# Altium PCB PCB1.pcbdoc (part 3 of 4)
Units mil, origin at the board's own origin, x right, y up, seen from the top; angles counter-clockwise.
Board outline 3346.69 x 4227.01 mil, 4 copper layers (Top Layer, Inner1, Inner2, Bottom Layer); 103 components, 144 nets, 660 pads, 262 vias.
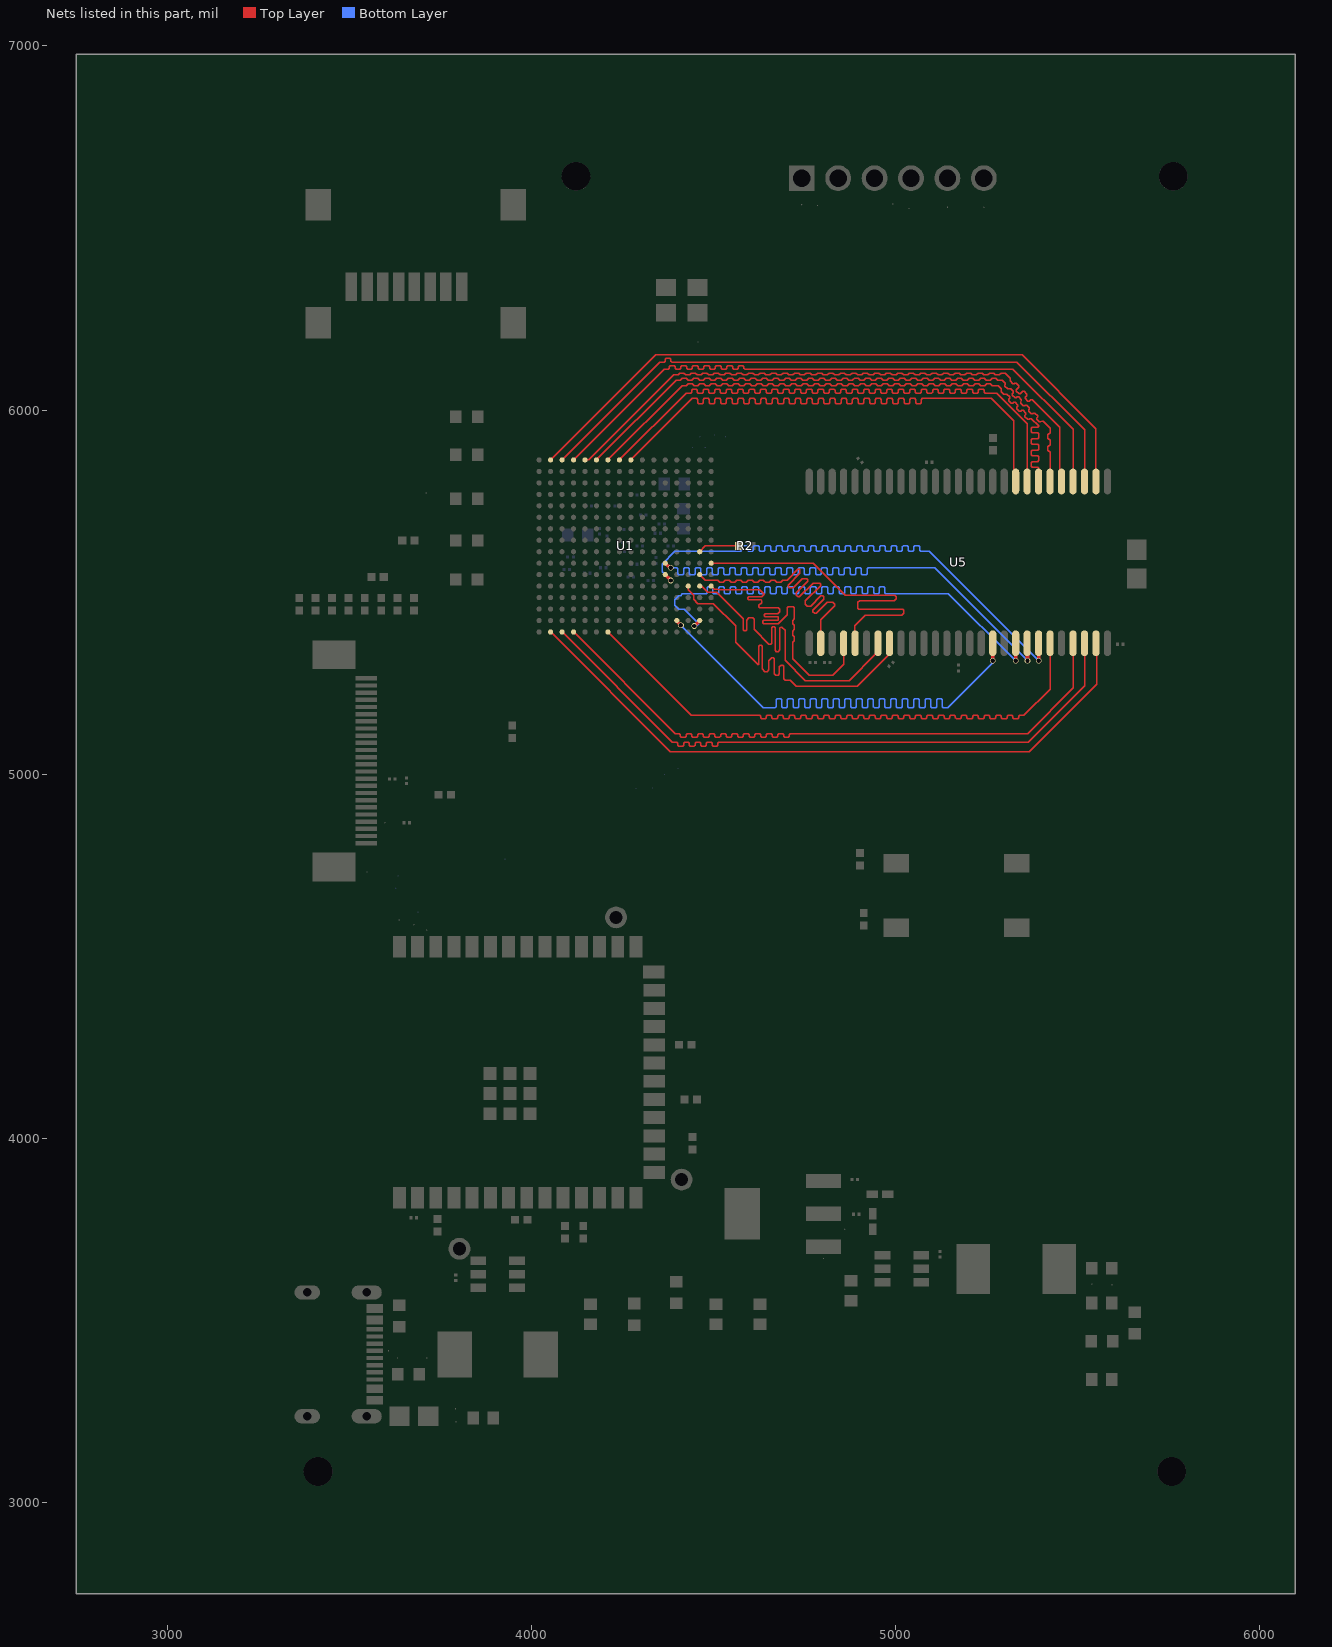
[diagram p5: the nets of this part, all layers, seen from the top]

## Via types
v1: diameter 15.75, hole 11.81, Top Layer to Bottom Layer, 262 vias

## Nets (pads, with @x,y where several pads share a name; then routed paths per layer and width w, separated by ;. In a path a pad name is that pad's centre, name@x,y a point inside that pad or via, vN(x,y) a via of type N, cw(c..) or ccw(c..) an arc to the next point about the centre after c; other vN are vias at no path point) (continued)
SD_A1: U1.T4 U5.24 | length 1796.6
  Top Layer w3.94: U1.T4@4115.28,5390.79 4394.06,5112.01 4405.87,5112.01 4408.65,5109.22 4408.65,5104.79 4411.44,5102.01 4421.62,5102.01 4424.4,5104.79 4424.4,5109.22 4427.18,5112.01 4437.36,5112.01 4440.15,5109.22 4440.15,5104.79 4442.93,5102.01 4453.11,5102.01 4455.9,5104.79 4455.9,5109.22 4458.68,5112.01 4468.86,5112.01 4471.64,5109.22 4471.64,5104.79 4474.43,5102.01 4484.61,5102.01 4487.39,5104.79 4487.39,5109.22 4490.18,5112.01 4500.36,5112.01 4503.14,5109.22 4503.14,5104.79 4505.92,5102.01 4516.11,5102.01 4518.89,5104.79 4518.89,5109.22 4521.67,5112.01 4531.85,5112.01 4534.64,5109.22 4534.64,5104.79 4537.42,5102.01 4547.6,5102.01 4550.39,5104.79 4550.39,5109.22 4553.17,5112.01 4563.35,5112.01 4566.13,5109.22 4566.13,5104.79 4568.92,5102.01 4579.1,5102.01 4581.88,5104.79 4581.88,5109.22 4584.66,5112.01 4594.85,5112.01 4597.63,5109.22 4597.63,5104.79 4600.41,5102.01 4610.59,5102.01 4613.38,5104.79 4613.38,5109.22 4616.16,5112.01 4626.34,5112.01 4629.13,5109.22 4629.13,5104.79 4631.91,5102.01 4642.09,5102.01 4644.87,5104.79 4644.87,5109.22 4647.66,5112.01 4657.84,5112.01 4660.62,5109.22 4660.62,5104.79 4663.41,5102.01 4673.59,5102.01 4676.37,5104.79 4676.37,5109.22 4679.15,5112.01 4689.33,5112.01 4692.12,5109.22 4692.12,5104.79 4694.9,5102.01 4705.08,5102.01 4707.87,5104.79 4707.87,5109.22 4710.65,5112.01 5362.01,5112.01 5487.01,5237.01 U5.24@5487.01,5359.84
SD_A2: U1.T3 U5.25 | length 1806.1
  Top Layer w3.94: U1.T3@4083.78,5390.79 4386.1,5088.47 4398.82,5088.47 4401.6,5085.68 4401.6,5079.79 4404.39,5077.01 4414.57,5077.01 4417.35,5079.79 4417.35,5085.68 4420.13,5088.47 4430.31,5088.47 4433.1,5085.68 4433.1,5079.79 4435.88,5077.01 4446.06,5077.01 4448.85,5079.79 4448.85,5085.68 4451.63,5088.47 4461.81,5088.47 4464.59,5085.68 4464.59,5079.79 4467.38,5077.01 4477.56,5077.01 4480.34,5079.79 4480.34,5085.68 4483.13,5088.47 4493.31,5088.47 4496.09,5085.68 4496.09,5079.79 4498.87,5077.01 4509.06,5077.01 4511.84,5079.79 4511.84,5085.68 4514.62,5088.47 5363.47,5088.47 5518.47,5243.47 U5.25@5518.47,5359.88
SD_A3: U1.T2 U5.26 | length 1826.3
  Top Layer w3.94: U1.T2@4052.29,5390.79 4381.07,5062.01 5367.01,5062.01 5552.01,5247.01 5552.01,5357.83 U5.26@5549.96,5359.88
SD_A4: U1.A2 U5.29 | length 1846.3
  Top Layer w3.94: U1.A2@4052.29,5863.23 4341.07,6152.01 5347.01,6152.01 5549.96,5949.06 U5.29@5549.96,5804.14
SD_A5: U1.A3 U5.30 | length 1778.1
  Top Layer w3.94: U1.A3@4083.78,5863.23 4352.56,6132.01 4364.37,6132.01 4367.15,6134.79 4367.15,6139.22 4369.94,6142.01 4380.12,6142.01 4382.9,6139.22 4382.9,6134.79 4385.68,6132.01 5332.01,6132.01 5518.47,5945.55 U5.30@5518.47,5804.14
SD_A6: U1.A4 U5.31 | length 1780.3
  Top Layer w3.94: U1.A4@4115.28,5863.23 4364.06,6112.01 4375.87,6112.01 4378.65,6114.79 4378.65,6119.22 4381.44,6122.01 4391.62,6122.01 4394.4,6119.22 4394.4,6114.79 4397.18,6112.01 4407.36,6112.01 4410.15,6114.79 4410.15,6119.22 4412.93,6122.01 4423.11,6122.01 4425.9,6119.22 4425.9,6114.79 4428.68,6112.01 4438.86,6112.01 4441.64,6114.79 4441.64,6119.22 4444.43,6122.01 4454.61,6122.01 4457.39,6119.22 4457.39,6114.79 4460.18,6112.01 4470.36,6112.01 4473.14,6114.79 4473.14,6119.22 4475.92,6122.01 4486.11,6122.01 4488.89,6119.22 4488.89,6114.79 4491.67,6112.01 4501.85,6112.01 4504.64,6114.79 4504.64,6119.22 4507.42,6122.01 4517.6,6122.01 4520.39,6119.22 4520.39,6114.79 4523.17,6112.01 4533.35,6112.01 4536.13,6114.79 4536.13,6119.22 4538.92,6122.01 4549.1,6122.01 4551.88,6119.22 4551.88,6114.79 4554.66,6112.01 4564.85,6112.01 4567.63,6114.79 4567.63,6119.22 4570.41,6122.01 4580.59,6122.01 4583.38,6119.22 4583.38,6114.79 4586.16,6112.01 5322.01,6112.01 5486.97,5947.05 U5.31@5486.97,5804.14
SD_A7: U1.A5 U5.32 | length 1774.3
  Top Layer w3.94: U1.A5@4146.77,5863.23 4157,5863.23 4390.78,6097.01 4402.59,6097.01 4407.59,6102.01 4418.34,6102.01 4423.34,6097.01 4434.09,6097.01 4439.09,6102.01 4449.83,6102.01 4454.83,6097.01 4465.58,6097.01 4470.58,6102.01 4481.33,6102.01 4486.33,6097.01 4497.08,6097.01 4502.08,6102.01 4512.83,6102.01 4517.83,6097.01 4528.57,6097.01 4533.57,6102.01 4544.32,6102.01 4549.32,6097.01 4560.07,6097.01 4565.07,6102.01 4575.82,6102.01 4580.82,6097.01 4591.57,6097.01 4596.57,6102.01 4607.31,6102.01 4612.31,6097.01 4623.06,6097.01 4628.06,6102.01 4638.81,6102.01 4643.81,6097.01 4654.56,6097.01 4659.56,6102.01 4670.31,6102.01 4675.31,6097.01 4686.05,6097.01 4691.05,6102.01 4701.8,6102.01 4706.8,6097.01 4717.55,6097.01 4722.55,6102.01 4733.3,6102.01 4738.3,6097.01 4749.05,6097.01 4754.05,6102.01 4764.79,6102.01 4769.79,6097.01 4780.54,6097.01 4785.54,6102.01 4796.29,6102.01 4801.29,6097.01 4812.04,6097.01 4817.04,6102.01 4827.79,6102.01 4832.79,6097.01 4843.53,6097.01 4848.53,6102.01 4859.28,6102.01 4864.28,6097.01 4875.03,6097.01 4880.03,6102.01 4890.78,6102.01 4895.78,6097.01 4906.53,6097.01 4911.53,6102.01 4922.28,6102.01 4927.28,6097.01 4938.02,6097.01 4943.02,6102.01 4953.77,6102.01 4958.77,6097.01 4969.52,6097.01 4974.52,6102.01 4985.27,6102.01 4990.27,6097.01 5001.02,6097.01 5006.02,6102.01 5016.76,6102.01 5021.76,6097.01 5032.51,6097.01 5037.51,6102.01 5048.26,6102.01 5053.26,6097.01 5064.01,6097.01 5069.01,6102.01 5079.76,6102.01 5084.76,6097.01 5095.5,6097.01 5100.5,6102.01 5111.25,6102.01 5116.25,6097.01 5127,6097.01 5132,6102.01 5142.75,6102.01 5147.75,6097.01 5158.5,6097.01 5163.5,6102.01 5174.24,6102.01 5179.24,6097.01 5189.99,6097.01 5194.99,6102.01 5205.74,6102.01 5210.74,6097.01 5221.49,6097.01 5226.49,6102.01 5237.24,6102.01 5242.24,6097.01 5252.98,6097.01 5257.98,6102.01 5268.73,6102.01 5273.73,6097.01 5284.48,6097.01 5289.48,6102.01 5300.23,6102.01 5314.88,6087.35 5314.88,6080.3 5322.08,6073.11 5326.02,6073.11 5326.5,6073.58 5330.43,6073.58 5337.63,6066.39 5337.63,6062.45 5331.56,6056.38 5331.56,6052.44 5338.76,6045.24 5342.69,6045.24 5348.77,6051.31 5352.7,6051.31 5359.9,6044.11 5359.9,6040.18 5355.74,6036.02 5355.74,6032.08 5362.94,6024.88 5366.88,6024.88 5371.04,6029.04 5374.97,6029.04 5450.48,5953.54 5450.48,5809.14 U5.32@5455.48,5804.14
SD_A8: U1.A6 U5.33 | length 1748.8
  Top Layer w3.94: U1.A6@4178.27,5863.23 4397.05,6082.01 4408.86,6082.01 4411.64,6084.79 4411.64,6085.2 4414.43,6087.98 4424.61,6087.98 4427.39,6085.2 4427.39,6084.79 4430.17,6082.01 4440.35,6082.01 4443.14,6084.79 4443.14,6085.2 4445.92,6087.98 4456.1,6087.98 4458.89,6085.2 4458.89,6084.79 4461.67,6082.01 4471.85,6082.01 4474.63,6084.79 4474.63,6085.2 4477.42,6087.98 4487.6,6087.98 4490.38,6085.2 4490.38,6084.79 4493.17,6082.01 4503.35,6082.01 4506.13,6084.79 4506.13,6085.2 4508.91,6087.98 4519.1,6087.98 4521.88,6085.2 4521.88,6084.79 4524.66,6082.01 4534.84,6082.01 4537.63,6084.79 4537.63,6085.2 4540.41,6087.98 4550.59,6087.98 4553.38,6085.2 4553.38,6084.79 4556.16,6082.01 4566.34,6082.01 4569.12,6084.79 4569.12,6085.2 4571.91,6087.98 4582.09,6087.98 4584.87,6085.2 4584.87,6084.79 4587.65,6082.01 4597.84,6082.01 4600.62,6084.79 4600.62,6085.2 4603.4,6087.98 4613.58,6087.98 4616.37,6085.2 4616.37,6084.79 4619.15,6082.01 4629.33,6082.01 4632.12,6084.79 4632.12,6085.2 4634.9,6087.98 4645.08,6087.98 4647.86,6085.2 4647.86,6084.79 4650.65,6082.01 4660.83,6082.01 4663.61,6084.79 4663.61,6085.2 4666.4,6087.98 4676.58,6087.98 4679.36,6085.2 4679.36,6084.79 4682.14,6082.01 4692.32,6082.01 4695.11,6084.79 4695.11,6085.2 4697.89,6087.98 4708.07,6087.98 4710.86,6085.2 4710.86,6084.79 4713.64,6082.01 4723.82,6082.01 4726.6,6084.79 4726.6,6085.2 4729.39,6087.98 4739.57,6087.98 4742.35,6085.2 4742.35,6084.79 4745.14,6082.01 4755.32,6082.01 4758.1,6084.79 4758.1,6085.2 4760.88,6087.98 4771.06,6087.98 4773.85,6085.2 4773.85,6084.79 4776.63,6082.01 4786.81,6082.01 4789.6,6084.79 4789.6,6085.2 4792.38,6087.98 4802.56,6087.98 4805.34,6085.2 4805.34,6084.79 4808.13,6082.01 4818.31,6082.01 4821.09,6084.79 4821.09,6085.2 4823.88,6087.98 4834.06,6087.98 4836.84,6085.2 4836.84,6084.79 4839.62,6082.01 4849.8,6082.01 4852.59,6084.79 4852.59,6085.2 4855.37,6087.98 4865.55,6087.98 4868.34,6085.2 4868.34,6084.79 4871.12,6082.01 4881.3,6082.01 4884.08,6084.79 4884.08,6085.2 4886.87,6087.98 4897.05,6087.98 4899.83,6085.2 4899.83,6084.79 4902.62,6082.01 4912.8,6082.01 4915.58,6084.79 4915.58,6085.2 4918.36,6087.98 4928.54,6087.98 4931.33,6085.2 4931.33,6084.79 4934.11,6082.01 4944.29,6082.01 4947.08,6084.79 4947.08,6085.2 4949.86,6087.98 4960.04,6087.98 4962.82,6085.2 4962.82,6084.79 4965.61,6082.01 4975.79,6082.01 4978.57,6084.79 4978.57,6085.2 4981.36,6087.98 4991.54,6087.98 4994.32,6085.2 4994.32,6084.79 4997.1,6082.01 5007.28,6082.01 5010.07,6084.79 5010.07,6085.2 5012.85,6087.98 5023.03,6087.98 5025.82,6085.2 5025.82,6084.79 5028.6,6082.01 5038.78,6082.01 5041.56,6084.79 5041.56,6085.2 5044.35,6087.98 5054.53,6087.98 5057.31,6085.2 5057.31,6084.79 5060.1,6082.01 5070.28,6082.01 5073.06,6084.79 5073.06,6085.2 5075.84,6087.98 5086.02,6087.98 5088.81,6085.2 5088.81,6084.79 5091.59,6082.01 5101.77,6082.01 5104.56,6084.79 5104.56,6085.2 5107.34,6087.98 5117.52,6087.98 5120.3,6085.2 5120.3,6084.79 5123.09,6082.01 5133.27,6082.01 5136.05,6084.79 5136.05,6085.2 5138.84,6087.98 5149.02,6087.98 5151.8,6085.2 5151.8,6084.79 5154.58,6082.01 5164.76,6082.01 5167.55,6084.79 5167.55,6085.2 5170.33,6087.98 5180.51,6087.98 5183.3,6085.2 5183.3,6084.79 5186.08,6082.01 5196.26,6082.01 5199.04,6084.79 5199.04,6085.2 5201.83,6087.98 5212.01,6087.98 5214.79,6085.2 5214.79,6084.79 5217.58,6082.01 5227.76,6082.01 5230.54,6084.79 5230.54,6085.2 5233.32,6087.98 5243.5,6087.98 5246.29,6085.2 5246.29,6084.79 5249.07,6082.01 5259.25,6082.01 5262.04,6084.79 5262.04,6085.2 5264.82,6087.98 5275,6087.98 5277.78,6085.2 5277.78,6084.79 5280.57,6082.01 5292.01,6082.01 5300.36,6073.66 5300.36,6069.72 5299.88,6069.24 5299.88,6065.3 5307.08,6058.11 5311.02,6058.11 5311.5,6058.58 5315.43,6058.58 5322.63,6051.39 5322.63,6047.45 5320.45,6045.27 5320.45,6041.33 5327.65,6034.13 5331.59,6034.13 5333.77,6036.31 5337.7,6036.31 5344.9,6029.11 5344.9,6025.18 5342.72,6023 5342.72,6019.06 5349.92,6011.86 5353.86,6011.86 5356.04,6014.04 5359.97,6014.04 5367.17,6006.84 5367.17,6002.91 5364.99,6000.73 5364.99,5996.79 5372.19,5989.59 5376.13,5989.59 5378.31,5991.77 5382.25,5991.77 5389.44,5984.57 5389.44,5980.63 5387.61,5978.8 5387.61,5974.86 5394.81,5967.67 5398.75,5967.67 5400.58,5969.5 5404.52,5969.5 5423.98,5950.04 5423.98,5938.23 5421.19,5935.44 5420.52,5935.44 5417.73,5932.66 5417.73,5922.48 5420.52,5919.69 5421.19,5919.69 5423.98,5916.91 5423.98,5905.1 5421.19,5902.32 5420.52,5902.32 5417.73,5899.53 5417.73,5889.35 5420.52,5886.57 5421.19,5886.57 5423.98,5883.78 U5.33@5423.98,5804.14
SD_A9: U1.A7 U5.34 | length 1787.7
  Top Layer w3.94: U1.A7@4209.77,5863.23 4413.55,6067.01 4425.36,6067.01 4428.14,6069.79 4428.14,6070.2 4430.93,6072.98 4441.11,6072.98 4443.89,6070.2 4443.89,6069.79 4446.67,6067.01 4456.85,6067.01 4459.64,6069.79 4459.64,6070.2 4462.42,6072.98 4472.6,6072.98 4475.39,6070.2 4475.39,6069.79 4478.17,6067.01 4488.35,6067.01 4491.13,6069.79 4491.13,6070.2 4493.92,6072.98 4504.1,6072.98 4506.88,6070.2 4506.88,6069.79 4509.67,6067.01 4519.85,6067.01 4522.63,6069.79 4522.63,6070.2 4525.41,6072.98 4535.6,6072.98 4538.38,6070.2 4538.38,6069.79 4541.16,6067.01 4551.34,6067.01 4554.13,6069.79 4554.13,6070.2 4556.91,6072.98 4567.09,6072.98 4569.88,6070.2 4569.88,6069.79 4572.66,6067.01 4582.84,6067.01 4585.62,6069.79 4585.62,6070.2 4588.41,6072.98 4598.59,6072.98 4601.37,6070.2 4601.37,6069.79 4604.15,6067.01 4614.34,6067.01 4617.12,6069.79 4617.12,6070.2 4619.9,6072.98 4630.08,6072.98 4632.87,6070.2 4632.87,6069.79 4635.65,6067.01 4645.83,6067.01 4648.62,6069.79 4648.62,6070.2 4651.4,6072.98 4661.58,6072.98 4664.36,6070.2 4664.36,6069.79 4667.15,6067.01 4677.33,6067.01 4680.11,6069.79 4680.11,6070.2 4682.9,6072.98 4693.08,6072.98 4695.86,6070.2 4695.86,6069.79 4698.64,6067.01 4708.82,6067.01 4711.61,6069.79 4711.61,6070.2 4714.39,6072.98 4724.57,6072.98 4727.36,6070.2 4727.36,6069.79 4730.14,6067.01 4740.32,6067.01 4743.1,6069.79 4743.1,6070.2 4745.89,6072.98 4756.07,6072.98 4758.85,6070.2 4758.85,6069.79 4761.64,6067.01 4771.82,6067.01 4774.6,6069.79 4774.6,6070.2 4777.38,6072.98 4787.56,6072.98 4790.35,6070.2 4790.35,6069.79 4793.13,6067.01 4803.31,6067.01 4806.1,6069.79 4806.1,6070.2 4808.88,6072.98 4819.06,6072.98 4821.84,6070.2 4821.84,6069.79 4824.63,6067.01 4834.81,6067.01 4837.59,6069.79 4837.59,6070.2 4840.38,6072.98 4850.56,6072.98 4853.34,6070.2 4853.34,6069.79 4856.12,6067.01 4866.3,6067.01 4869.09,6069.79 4869.09,6070.2 4871.87,6072.98 4882.05,6072.98 4884.84,6070.2 4884.84,6069.79 4887.62,6067.01 4897.8,6067.01 4900.58,6069.79 4900.58,6070.2 4903.37,6072.98 4913.55,6072.98 4916.33,6070.2 4916.33,6069.79 4919.12,6067.01 4929.3,6067.01 4932.08,6069.79 4932.08,6070.2 4934.86,6072.98 4945.04,6072.98 4947.83,6070.2 4947.83,6069.79 4950.61,6067.01 4960.79,6067.01 4963.58,6069.79 4963.58,6070.2 4966.36,6072.98 4976.54,6072.98 4979.32,6070.2 4979.32,6069.79 4982.11,6067.01 4992.29,6067.01 4995.07,6069.79 4995.07,6070.2 4997.86,6072.98 5008.04,6072.98 5010.82,6070.2 5010.82,6069.79 5013.6,6067.01 5023.78,6067.01 5026.57,6069.79 5026.57,6070.2 5029.35,6072.98 5039.53,6072.98 5042.32,6070.2 5042.32,6069.79 5045.1,6067.01 5055.28,6067.01 5058.06,6069.79 5058.06,6070.2 5060.85,6072.98 5071.03,6072.98 5073.81,6070.2 5073.81,6069.79 5076.6,6067.01 5086.78,6067.01 5089.56,6069.79 5089.56,6070.2 5092.34,6072.98 5102.52,6072.98 5105.31,6070.2 5105.31,6069.79 5108.09,6067.01 5118.27,6067.01 5121.06,6069.79 5121.06,6070.2 5123.84,6072.98 5134.02,6072.98 5136.8,6070.2 5136.8,6069.79 5139.59,6067.01 5149.77,6067.01 5152.55,6069.79 5152.55,6070.2 5155.34,6072.98 5165.52,6072.98 5168.3,6070.2 5168.3,6069.79 5171.08,6067.01 5181.26,6067.01 5184.05,6069.79 5184.05,6070.2 5186.83,6072.98 5197.01,6072.98 5199.8,6070.2 5199.8,6069.79 5202.58,6067.01 5212.76,6067.01 5215.54,6069.79 5215.54,6070.2 5218.33,6072.98 5228.51,6072.98 5231.29,6070.2 5231.29,6069.79 5234.08,6067.01 5244.26,6067.01 5247.04,6069.79 5247.04,6070.2 5249.82,6072.98 5260,6072.98 5262.79,6070.2 5262.79,6069.79 5265.57,6067.01 5282.01,6067.01 5290.36,6058.66 5290.36,6054.72 5289.88,6054.24 5289.88,6050.3 5297.08,6043.11 5301.02,6043.11 5301.5,6043.58 5305.43,6043.58 5312.63,6036.39 5312.63,6032.45 5310.45,6030.27 5310.45,6026.33 5317.65,6019.13 5321.59,6019.13 5323.77,6021.31 5327.7,6021.31 5334.9,6014.11 5334.9,6010.18 5332.72,6008 5332.72,6004.06 5339.92,5996.86 5343.86,5996.86 5346.04,5999.04 5349.97,5999.04 5357.17,5991.84 5357.17,5987.91 5354.99,5985.73 5354.99,5981.79 5362.19,5974.59 5366.13,5974.59 5368.31,5976.77 5372.25,5976.77 5392.48,5956.54 5392.48,5956.22 5389.69,5953.44 5374.79,5953.44 5372.01,5950.65 5372.01,5940.47 5374.79,5937.69 5389.69,5937.69 5392.48,5934.9 5392.48,5924.72 5389.69,5921.94 5374.79,5921.94 5372.01,5919.16 5372.01,5908.98 5374.79,5906.19 5389.69,5906.19 5392.48,5903.41 5392.48,5893.23 5389.69,5890.44 5374.79,5890.44 5372.01,5887.66 5372.01,5877.48 5374.79,5874.7 5389.69,5874.7 5392.48,5871.91 5392.48,5861.73 5389.69,5858.95 5374.79,5858.95 5372.01,5856.16 5372.01,5845.98 5374.79,5843.2 5389.69,5843.2 5392.48,5840.42 U5.34@5392.48,5804.14
SD_A10: U1.T7 U5.22 | length 1774.7
  Top Layer w3.94: U1.T7@4209.77,5390.79 4438.55,5162.01 4625.97,5162.01 4628.75,5159.22 4628.75,5154.79 4631.54,5152.01 4641.72,5152.01 4644.5,5154.79 4644.5,5159.22 4647.28,5162.01 4657.46,5162.01 4660.25,5159.22 4660.25,5154.79 4663.03,5152.01 4673.21,5152.01 4676,5154.79 4676,5159.22 4678.78,5162.01 4688.96,5162.01 4691.74,5159.22 4691.74,5154.79 4694.53,5152.01 4704.71,5152.01 4707.49,5154.79 4707.49,5159.22 4710.28,5162.01 4720.46,5162.01 4723.24,5159.22 4723.24,5154.79 4726.02,5152.01 4736.2,5152.01 4738.99,5154.79 4738.99,5159.22 4741.77,5162.01 4751.95,5162.01 4754.74,5159.22 4754.74,5154.79 4757.52,5152.01 4767.7,5152.01 4770.48,5154.79 4770.48,5159.22 4773.27,5162.01 4783.45,5162.01 4786.23,5159.22 4786.23,5154.79 4789.02,5152.01 4799.2,5152.01 4801.98,5154.79 4801.98,5159.22 4804.76,5162.01 4814.94,5162.01 4817.73,5159.22 4817.73,5154.79 4820.51,5152.01 4830.69,5152.01 4833.48,5154.79 4833.48,5159.22 4836.26,5162.01 4846.44,5162.01 4849.22,5159.22 4849.22,5154.79 4852.01,5152.01 4862.19,5152.01 4864.97,5154.79 4864.97,5159.22 4867.76,5162.01 4877.94,5162.01 4880.72,5159.22 4880.72,5154.79 4883.5,5152.01 4893.68,5152.01 4896.47,5154.79 4896.47,5159.22 4899.25,5162.01 4909.43,5162.01 4912.22,5159.22 4912.22,5154.79 4915,5152.01 4925.18,5152.01 4927.96,5154.79 4927.96,5159.22 4930.75,5162.01 4940.93,5162.01 4943.71,5159.22 4943.71,5154.79 4946.5,5152.01 4956.68,5152.01 4959.46,5154.79 4959.46,5159.22 4962.24,5162.01 4972.42,5162.01 4975.21,5159.22 4975.21,5154.79 4977.99,5152.01 4988.17,5152.01 4990.96,5154.79 4990.96,5159.22 4993.74,5162.01 5003.92,5162.01 5006.7,5159.22 5006.7,5154.79 5009.49,5152.01 5019.67,5152.01 5022.45,5154.79 5022.45,5159.22 5025.24,5162.01 5035.42,5162.01 5038.2,5159.22 5038.2,5154.79 5040.98,5152.01 5051.16,5152.01 5053.95,5154.79 5053.95,5159.22 5056.73,5162.01 5066.91,5162.01 5069.7,5159.22 5069.7,5154.79 5072.48,5152.01 5082.66,5152.01 5085.44,5154.79 5085.44,5159.22 5088.23,5162.01 5098.41,5162.01 5101.19,5159.22 5101.19,5154.79 5103.98,5152.01 5114.16,5152.01 5116.94,5154.79 5116.94,5159.22 5119.72,5162.01 5129.9,5162.01 5132.69,5159.22 5132.69,5154.79 5135.47,5152.01 5145.65,5152.01 5148.44,5154.79 5148.44,5159.22 5151.22,5162.01 5161.4,5162.01 5164.18,5159.22 5164.18,5154.79 5166.97,5152.01 5177.15,5152.01 5179.93,5154.79 5179.93,5159.22 5182.72,5162.01 5192.9,5162.01 5195.68,5159.22 5195.68,5154.79 5198.46,5152.01 5208.64,5152.01 5211.43,5154.79 5211.43,5159.22 5214.21,5162.01 5224.39,5162.01 5227.18,5159.22 5227.18,5154.79 5229.96,5152.01 5240.14,5152.01 5242.92,5154.79 5242.92,5159.22 5245.71,5162.01 5255.89,5162.01 5258.67,5159.22 5258.67,5154.79 5261.46,5152.01 5271.64,5152.01 5274.42,5154.79 5274.42,5159.22 5277.2,5162.01 5287.39,5162.01 5290.17,5159.22 5290.17,5154.79 5292.95,5152.01 5303.13,5152.01 5305.92,5154.79 5305.92,5159.22 5308.7,5162.01 5318.88,5162.01 5321.66,5159.22 5321.66,5154.79 5324.45,5152.01 5334.63,5152.01 5337.41,5154.79 5337.41,5159.22 5340.2,5162.01 5352.01,5162.01 5423.98,5233.98 U5.22@5423.98,5359.88
SD_A11: U1.A8 U5.35 | length 1739.9
  Top Layer w3.94: U1.A8@4241.26,5863.23 4425.04,6047.01 4436.85,6047.01 4439.63,6049.79 4439.63,6054.22 4442.42,6057.01 4452.6,6057.01 4455.38,6054.22 4455.38,6049.79 4458.16,6047.01 4468.35,6047.01 4471.13,6049.79 4471.13,6054.22 4473.91,6057.01 4484.09,6057.01 4486.88,6054.22 4486.88,6049.79 4489.66,6047.01 4499.84,6047.01 4502.62,6049.79 4502.62,6054.22 4505.41,6057.01 4515.59,6057.01 4518.37,6054.22 4518.37,6049.79 4521.16,6047.01 4531.34,6047.01 4534.12,6049.79 4534.12,6054.22 4536.9,6057.01 4547.09,6057.01 4549.87,6054.22 4549.87,6049.79 4552.65,6047.01 4562.83,6047.01 4565.62,6049.79 4565.62,6054.22 4568.4,6057.01 4578.58,6057.01 4581.37,6054.22 4581.37,6049.79 4584.15,6047.01 4594.33,6047.01 4597.11,6049.79 4597.11,6054.22 4599.9,6057.01 4610.08,6057.01 4612.86,6054.22 4612.86,6049.79 4615.65,6047.01 4625.83,6047.01 4628.61,6049.79 4628.61,6054.22 4631.39,6057.01 4641.57,6057.01 4644.36,6054.22 4644.36,6049.79 4647.14,6047.01 4657.32,6047.01 4660.11,6049.79 4660.11,6054.22 4662.89,6057.01 4673.07,6057.01 4675.85,6054.22 4675.85,6049.79 4678.64,6047.01 4688.82,6047.01 4691.6,6049.79 4691.6,6054.22 4694.39,6057.01 4704.57,6057.01 4707.35,6054.22 4707.35,6049.79 4710.13,6047.01 4720.31,6047.01 4723.1,6049.79 4723.1,6054.22 4725.88,6057.01 4736.06,6057.01 4738.85,6054.22 4738.85,6049.79 4741.63,6047.01 4751.81,6047.01 4754.59,6049.79 4754.59,6054.22 4757.38,6057.01 4767.56,6057.01 4770.34,6054.22 4770.34,6049.79 4773.13,6047.01 4783.31,6047.01 4786.09,6049.79 4786.09,6054.22 4788.87,6057.01 4799.05,6057.01 4801.84,6054.22 4801.84,6049.79 4804.62,6047.01 4814.8,6047.01 4817.59,6049.79 4817.59,6054.22 4820.37,6057.01 4830.55,6057.01 4833.33,6054.22 4833.33,6049.79 4836.12,6047.01 4846.3,6047.01 4849.08,6049.79 4849.08,6054.22 4851.87,6057.01 4862.05,6057.01 4864.83,6054.22 4864.83,6049.79 4867.61,6047.01 4877.79,6047.01 4880.58,6049.79 4880.58,6054.22 4883.36,6057.01 4893.54,6057.01 4896.33,6054.22 4896.33,6049.79 4899.11,6047.01 4909.29,6047.01 4912.07,6049.79 4912.07,6054.22 4914.86,6057.01 4925.04,6057.01 4927.82,6054.22 4927.82,6049.79 4930.61,6047.01 4940.79,6047.01 4943.57,6049.79 4943.57,6054.22 4946.35,6057.01 4956.53,6057.01 4959.32,6054.22 4959.32,6049.79 4962.1,6047.01 4972.28,6047.01 4975.07,6049.79 4975.07,6054.22 4977.85,6057.01 4988.03,6057.01 4990.81,6054.22 4990.81,6049.79 4993.6,6047.01 5003.78,6047.01 5006.56,6049.79 5006.56,6054.22 5009.35,6057.01 5019.53,6057.01 5022.31,6054.22 5022.31,6049.79 5025.09,6047.01 5035.27,6047.01 5038.06,6049.79 5038.06,6054.22 5040.84,6057.01 5051.02,6057.01 5053.81,6054.22 5053.81,6049.79 5056.59,6047.01 5066.77,6047.01 5069.55,6049.79 5069.55,6054.22 5072.34,6057.01 5082.52,6057.01 5085.3,6054.22 5085.3,6049.79 5088.09,6047.01 5098.27,6047.01 5101.05,6049.79 5101.05,6054.22 5103.83,6057.01 5114.01,6057.01 5116.8,6054.22 5116.8,6049.79 5119.58,6047.01 5129.76,6047.01 5132.55,6049.79 5132.55,6054.22 5135.33,6057.01 5145.51,6057.01 5148.29,6054.22 5148.29,6049.79 5151.08,6047.01 5161.26,6047.01 5164.04,6049.79 5164.04,6054.22 5166.83,6057.01 5177.01,6057.01 5179.79,6054.22 5179.79,6049.79 5182.57,6047.01 5192.75,6047.01 5195.54,6049.79 5195.54,6054.22 5198.32,6057.01 5208.5,6057.01 5211.29,6054.22 5211.29,6049.79 5214.07,6047.01 5224.25,6047.01 5227.03,6049.79 5227.03,6054.22 5229.82,6057.01 5240,6057.01 5242.78,6054.22 5242.78,6049.79 5245.57,6047.01 5277.01,6047.01 5360.99,5963.03 U5.35@5360.99,5804.14
SD_A12: U1.A9 U5.36 | length 1784.5
  Top Layer w3.94: U1.A9@4272.76,5863.23 4441.54,6032.01 4453.35,6032.01 4456.13,6029.22 4456.13,6019.79 4458.92,6017.01 4469.1,6017.01 4471.88,6019.79 4471.88,6029.22 4474.66,6032.01 4484.85,6032.01 4487.63,6029.22 4487.63,6019.79 4490.41,6017.01 4500.59,6017.01 4503.38,6019.79 4503.38,6029.22 4506.16,6032.01 4516.34,6032.01 4519.12,6029.22 4519.12,6019.79 4521.91,6017.01 4532.09,6017.01 4534.87,6019.79 4534.87,6029.22 4537.66,6032.01 4547.84,6032.01 4550.62,6029.22 4550.62,6019.79 4553.4,6017.01 4563.59,6017.01 4566.37,6019.79 4566.37,6029.22 4569.15,6032.01 4579.33,6032.01 4582.12,6029.22 4582.12,6019.79 4584.9,6017.01 4595.08,6017.01 4597.87,6019.79 4597.87,6029.22 4600.65,6032.01 4610.83,6032.01 4613.61,6029.22 4613.61,6019.79 4616.4,6017.01 4626.58,6017.01 4629.36,6019.79 4629.36,6029.22 4632.15,6032.01 4642.33,6032.01 4645.11,6029.22 4645.11,6019.79 4647.89,6017.01 4658.07,6017.01 4660.86,6019.79 4660.86,6029.22 4663.64,6032.01 4673.82,6032.01 4676.61,6029.22 4676.61,6019.79 4679.39,6017.01 4689.57,6017.01 4692.35,6019.79 4692.35,6029.22 4695.14,6032.01 4705.32,6032.01 4708.1,6029.22 4708.1,6019.79 4710.89,6017.01 4721.07,6017.01 4723.85,6019.79 4723.85,6029.22 4726.63,6032.01 4736.81,6032.01 4739.6,6029.22 4739.6,6019.79 4742.38,6017.01 4752.56,6017.01 4755.35,6019.79 4755.35,6029.22 4758.13,6032.01 4768.31,6032.01 4771.09,6029.22 4771.09,6019.79 4773.88,6017.01 4784.06,6017.01 4786.84,6019.79 4786.84,6029.22 4789.63,6032.01 4799.81,6032.01 4802.59,6029.22 4802.59,6019.79 4805.37,6017.01 4815.55,6017.01 4818.34,6019.79 4818.34,6029.22 4821.12,6032.01 4831.3,6032.01 4834.09,6029.22 4834.09,6019.79 4836.87,6017.01 4847.05,6017.01 4849.83,6019.79 4849.83,6029.22 4852.62,6032.01 4862.8,6032.01 4865.58,6029.22 4865.58,6019.79 4868.37,6017.01 4878.55,6017.01 4881.33,6019.79 4881.33,6029.22 4884.11,6032.01 4894.29,6032.01 4897.08,6029.22 4897.08,6019.79 4899.86,6017.01 4910.04,6017.01 4912.83,6019.79 4912.83,6029.22 4915.61,6032.01 4925.79,6032.01 4928.57,6029.22 4928.57,6019.79 4931.36,6017.01 4941.54,6017.01 4944.32,6019.79 4944.32,6029.22 4947.11,6032.01 4957.29,6032.01 4960.07,6029.22 4960.07,6019.79 4962.85,6017.01 4973.03,6017.01 4975.82,6019.79 4975.82,6029.22 4978.6,6032.01 4988.78,6032.01 4991.57,6029.22 4991.57,6019.79 4994.35,6017.01 5004.53,6017.01 5007.31,6019.79 5007.31,6029.22 5010.1,6032.01 5020.28,6032.01 5023.06,6029.22 5023.06,6019.79 5025.85,6017.01 5036.03,6017.01 5038.81,6019.79 5038.81,6029.22 5041.59,6032.01 5051.77,6032.01 5054.56,6029.22 5054.56,6019.79 5057.34,6017.01 5067.52,6017.01 5070.31,6019.79 5070.31,6029.22 5073.09,6032.01 5262.01,6032.01 5323.81,5970.2 5323.81,5819.81 5324.49,5819.14 5324.49,5809.14 U5.36@5329.49,5804.14
SD_BA0: U1.K12 U5.20 | length 1708.5
  Top Layer w10: U1.K12@4367.25,5579.77 4380.07,5566.94 v1(4381.94,5566.94) ; U5.20@5360.99,5359.88 5362.01,5358.86 v1(5362.01,5312.01)
  Bottom Layer w3.94: v1(4381.94,5566.94) 4399.31,5566.94 4402.09,5564.16 4402.09,5550.16 4404.87,5547.37 4415.05,5547.37 4417.84,5550.16 4417.84,5564.16 4420.62,5566.94 4430.8,5566.94 4433.59,5564.16 4433.59,5550.16 4436.37,5547.37 4446.55,5547.37 4449.33,5550.16 4449.33,5564.16 4452.12,5566.94 4462.3,5566.94 4465.08,5564.16 4465.08,5550.16 4467.87,5547.37 4478.05,5547.37 4480.83,5550.16 4480.83,5564.16 4483.61,5566.94 4493.79,5566.94 4496.58,5564.16 4496.58,5550.16 4499.36,5547.37 4509.54,5547.37 4512.33,5550.16 4512.33,5564.16 4515.11,5566.94 4525.29,5566.94 4528.07,5564.16 4528.07,5550.16 4530.86,5547.37 4541.04,5547.37 4543.82,5550.16 4543.82,5564.16 4546.61,5566.94 4556.79,5566.94 4559.57,5564.16 4559.57,5550.16 4562.35,5547.37 4572.53,5547.37 4575.32,5550.16 4575.32,5564.16 4578.1,5566.94 4588.28,5566.94 4591.07,5564.16 4591.07,5550.16 4593.85,5547.37 4604.03,5547.37 4606.81,5550.16 4606.81,5564.16 4609.6,5566.94 4619.78,5566.94 4622.56,5564.16 4622.56,5550.16 4625.35,5547.37 4635.53,5547.37 4638.31,5550.16 4638.31,5564.16 4641.09,5566.94 4651.27,5566.94 4654.06,5564.16 4654.06,5550.16 4656.84,5547.37 4667.02,5547.37 4669.81,5550.16 4669.81,5564.16 4672.59,5566.94 4682.77,5566.94 4685.55,5564.16 4685.55,5550.16 4688.34,5547.37 4698.52,5547.37 4701.3,5550.16 4701.3,5564.16 4704.09,5566.94 4714.27,5566.94 4717.05,5564.16 4717.05,5550.16 4719.83,5547.37 4730.01,5547.37 4732.8,5550.16 4732.8,5564.16 4735.58,5566.94 4745.76,5566.94 4748.55,5564.16 4748.55,5550.16 4751.33,5547.37 4761.51,5547.37 4764.29,5550.16 4764.29,5564.16 4767.08,5566.94 4777.26,5566.94 4780.04,5564.16 4780.04,5550.16 4782.83,5547.37 4793.01,5547.37 4795.79,5550.16 4795.79,5564.16 4798.57,5566.94 4808.75,5566.94 4811.54,5564.16 4811.54,5550.16 4814.32,5547.37 4824.5,5547.37 4827.29,5550.16 4827.29,5564.16 4830.07,5566.94 4840.25,5566.94 4843.03,5564.16 4843.03,5550.16 4845.82,5547.37 4856,5547.37 4858.78,5550.16 4858.78,5564.16 4861.57,5566.94 4871.75,5566.94 4874.53,5564.16 4874.53,5550.16 4877.31,5547.37 4887.49,5547.37 4890.28,5550.16 4890.28,5564.16 4893.06,5566.94 4903.24,5566.94 4906.03,5564.16 4906.03,5550.16 4908.81,5547.37 4918.99,5547.37 4921.77,5550.16 4921.77,5564.16 4924.56,5566.94 5107.07,5566.94 v1(5362.01,5312.01)
SD_BA1: U1.L12 U5.21 | length 1673.6
  Top Layer w10: U1.L12@4367.25,5548.27 4382.01,5533.51 v1(4382.01,5532.01) ; v1(5392.48,5312.01) U5.21@5392.48,5359.88
  Bottom Layer w3.94: v1(4382.01,5532.01) 4358.24,5555.77 4358.24,5576.76 4393.49,5612.01 4574.9,5612.01 4577.68,5614.79 4577.68,5624.22 4580.46,5627.01 4590.64,5627.01 4593.43,5624.22 4593.43,5614.79 4596.21,5612.01 4606.39,5612.01 4609.18,5614.79 4609.18,5624.22 4611.96,5627.01 4622.14,5627.01 4624.92,5624.22 4624.92,5614.79 4627.71,5612.01 4637.89,5612.01 4640.67,5614.79 4640.67,5624.22 4643.46,5627.01 4653.64,5627.01 4656.42,5624.22 4656.42,5614.79 4659.2,5612.01 4669.38,5612.01 4672.17,5614.79 4672.17,5624.22 4674.95,5627.01 4685.13,5627.01 4687.92,5624.22 4687.92,5614.79 4690.7,5612.01 4700.88,5612.01 4703.66,5614.79 4703.66,5624.22 4706.45,5627.01 4716.63,5627.01 4719.41,5624.22 4719.41,5614.79 4722.2,5612.01 4732.38,5612.01 4735.16,5614.79 4735.16,5624.22 4737.94,5627.01 4748.12,5627.01 4750.91,5624.22 4750.91,5614.79 4753.69,5612.01 4763.87,5612.01 4766.66,5614.79 4766.66,5624.22 4769.44,5627.01 4779.62,5627.01 4782.4,5624.22 4782.4,5614.79 4785.19,5612.01 4795.37,5612.01 4798.15,5614.79 4798.15,5624.22 4800.94,5627.01 4811.12,5627.01 4813.9,5624.22 4813.9,5614.79 4816.68,5612.01 4826.86,5612.01 4829.65,5614.79 4829.65,5624.22 4832.43,5627.01 4842.61,5627.01 4845.4,5624.22 4845.4,5614.79 4848.18,5612.01 4858.36,5612.01 4861.14,5614.79 4861.14,5624.22 4863.93,5627.01 4874.11,5627.01 4876.89,5624.22 4876.89,5614.79 4879.68,5612.01 4889.86,5612.01 4892.64,5614.79 4892.64,5624.22 4895.42,5627.01 4905.6,5627.01 4908.39,5624.22 4908.39,5614.79 4911.17,5612.01 4921.35,5612.01 4924.14,5614.79 4924.14,5624.22 4926.92,5627.01 4937.1,5627.01 4939.88,5624.22 4939.88,5614.79 4942.67,5612.01 4952.85,5612.01 4955.63,5614.79 4955.63,5624.22 4958.42,5627.01 4968.6,5627.01 4971.38,5624.22 4971.38,5614.79 4974.16,5612.01 4984.34,5612.01 4987.13,5614.79 4987.13,5624.22 4989.91,5627.01 5000.09,5627.01 5002.88,5624.22 5002.88,5614.79 5005.66,5612.01 5015.84,5612.01 5018.62,5614.79 5018.62,5624.22 5021.41,5627.01 5031.59,5627.01 5034.37,5624.22 5034.37,5614.79 5037.16,5612.01 5047.34,5612.01 5050.12,5614.79 5050.12,5624.22 5052.9,5627.01 5063.08,5627.01 5065.87,5624.22 5065.87,5614.79 5068.65,5612.01 5092.48,5612.01 v1(5392.48,5312.01)
SD_CAS_N: U1.R13 U5.17 | length 1697.4
  Top Layer w10: U1.R13@4398.74,5422.29 4398.74,5420.41 v1(4410.1,5409.05) ; v1(5266.5,5312.01) U5.17@5266.5,5359.88
  Bottom Layer w3.94: v1(4410.1,5409.05) 4636.23,5182.91 4668.5,5182.91 4671.29,5185.7 4671.29,5204.22 4674.07,5207.01 4684.25,5207.01 4687.03,5204.22 4687.03,5185.7 4689.82,5182.91 4700,5182.91 4702.78,5185.7 4702.78,5204.22 4705.57,5207.01 4715.75,5207.01 4718.53,5204.22 4718.53,5185.7 4721.31,5182.91 4731.49,5182.91 4734.28,5185.7 4734.28,5204.22 4737.06,5207.01 4747.24,5207.01 4750.03,5204.22 4750.03,5185.7 4752.81,5182.91 4762.99,5182.91 4765.77,5185.7 4765.77,5204.22 4768.56,5207.01 4778.74,5207.01 4781.52,5204.22 4781.52,5185.7 4784.31,5182.91 4794.49,5182.91 4797.27,5185.7 4797.27,5204.22 4800.05,5207.01 4810.23,5207.01 4813.02,5204.22 4813.02,5185.7 4815.8,5182.91 4825.98,5182.91 4828.77,5185.7 4828.77,5204.22 4831.55,5207.01 4841.73,5207.01 4844.51,5204.22 4844.51,5185.7 4847.3,5182.91 4857.48,5182.91 4860.26,5185.7 4860.26,5204.22 4863.05,5207.01 4873.23,5207.01 4876.01,5204.22 4876.01,5185.7 4878.79,5182.91 4888.97,5182.91 4891.76,5185.7 4891.76,5204.22 4894.54,5207.01 4904.72,5207.01 4907.51,5204.22 4907.51,5185.7 4910.29,5182.91 4920.47,5182.91 4923.25,5185.7 4923.25,5204.22 4926.04,5207.01 4936.22,5207.01 4939,5204.22 4939,5185.7 4941.79,5182.91 4951.97,5182.91 4954.75,5185.7 4954.75,5204.22 4957.53,5207.01 4967.71,5207.01 4970.5,5204.22 4970.5,5185.7 4973.28,5182.91 4983.46,5182.91 4986.25,5185.7 4986.25,5204.22 4989.03,5207.01 4999.21,5207.01 5001.99,5204.22 5001.99,5185.7 5004.78,5182.91 5014.96,5182.91 5017.74,5185.7 5017.74,5204.22 5020.53,5207.01 5030.71,5207.01 5033.49,5204.22 5033.49,5185.7 5036.27,5182.91 5046.45,5182.91 5049.24,5185.7 5049.24,5204.22 5052.02,5207.01 5062.2,5207.01 5064.99,5204.22 5064.99,5185.7 5067.77,5182.91 5077.95,5182.91 5080.73,5185.7 5080.73,5204.22 5083.52,5207.01 5093.7,5207.01 5096.48,5204.22 5096.48,5185.7 5099.27,5182.91 5109.45,5182.91 5112.23,5185.7 5112.23,5204.22 5115.01,5207.01 5125.19,5207.01 5127.98,5204.22 5127.98,5185.7 5130.76,5182.91 5142.57,5182.91 5266.5,5306.84 v1(5266.5,5312.01)
SD_CLK: R2.2 U1.J15 | length 114.8
  Top Layer w3.94: U1.J15@4461.73,5611.26 4477.48,5627.01 R2.2@4569.97,5627.01
SD_CS_N: U1.R15 U5.19 | length 1693.9
  Top Layer w10: v1(4447.01,5407.01) 4461.73,5421.73 U1.R15@4461.73,5422.29 ; v1(5329.49,5312.01) U5.19@5329.49,5359.88
  Bottom Layer w3.94: v1(4447.01,5407.01) 4452.01,5407.01 4458.67,5413.67 4419.2,5453.15 4404.2,5453.15 4393.15,5464.2 4393.15,5479.82 4404.2,5490.87 4409.2,5490.87 4414.2,5495.87 4479.56,5495.87 4482.34,5498.65 4482.34,5511.62 4485.12,5514.41 4495.3,5514.41 4498.09,5511.62 4498.09,5498.65 4500.87,5495.87 4511.05,5495.87 4513.84,5498.65 4513.84,5511.62 4516.62,5514.41 4526.8,5514.41 4529.58,5511.62 4529.58,5498.65 4532.37,5495.87 4542.55,5495.87 4545.33,5498.65 4545.33,5511.62 4548.12,5514.41 4558.3,5514.41 4561.08,5511.62 4561.08,5498.65 4563.86,5495.87 4574.04,5495.87 4576.83,5498.65 4576.83,5511.62 4579.61,5514.41 4589.79,5514.41 4592.58,5511.62 4592.58,5498.65 4595.36,5495.87 4605.54,5495.87 4608.32,5498.65 4608.32,5511.62 4611.11,5514.41 4621.29,5514.41 4624.07,5511.62 4624.07,5498.65 4626.86,5495.87 4637.04,5495.87 4639.82,5498.65 4639.82,5511.62 4642.6,5514.41 4652.78,5514.41 4655.57,5511.62 4655.57,5498.65 4658.35,5495.87 4668.53,5495.87 4671.32,5498.65 4671.32,5511.62 4674.1,5514.41 4684.28,5514.41 4687.06,5511.62 4687.06,5498.65 4689.85,5495.87 4700.03,5495.87 4702.81,5498.65 4702.81,5511.62 4705.6,5514.41 4715.78,5514.41 4718.56,5511.62 4718.56,5498.65 4721.34,5495.87 4731.52,5495.87 4734.31,5498.65 4734.31,5511.62 4737.09,5514.41 4747.27,5514.41 4750.06,5511.62 4750.06,5498.65 4752.84,5495.87 4763.02,5495.87 4765.8,5498.65 4765.8,5511.62 4768.59,5514.41 4778.77,5514.41 4781.55,5511.62 4781.55,5498.65 4784.34,5495.87 4794.52,5495.87 4797.3,5498.65 4797.3,5511.62 4800.08,5514.41 4810.26,5514.41 4813.05,5511.62 4813.05,5498.65 4815.83,5495.87 4826.01,5495.87 4828.8,5498.65 4828.8,5511.62 4831.58,5514.41 4841.76,5514.41 4844.54,5511.62 4844.54,5498.65 4847.33,5495.87 4857.51,5495.87 4860.29,5498.65 4860.29,5511.62 4863.08,5514.41 4873.26,5514.41 4876.04,5511.62 4876.04,5498.65 4878.82,5495.87 4889,5495.87 4891.79,5498.65 4891.79,5511.62 4894.57,5514.41 4904.75,5514.41 4907.54,5511.62 4907.54,5498.65 4910.32,5495.87 4920.5,5495.87 4923.28,5498.65 4923.28,5511.62 4926.07,5514.41 4936.25,5514.41 4939.03,5511.62 4939.03,5498.65 4941.82,5495.87 4952,5495.87 4954.78,5498.65 4954.78,5511.62 4957.56,5514.41 4967.74,5514.41 4970.53,5511.62 4970.53,5498.65 4973.31,5495.87 5144.82,5495.87 5323.68,5317.01 5324.49,5317.01 v1(5329.49,5312.01)
SD_DQ0: U1.L15 U5.2 | length 983.7
  Top Layer w3.94: U1.L15@4461.73,5548.27 4476.77,5533.23 4510.9,5533.23 4513.68,5530.44 4513.68,5529.79 4516.47,5527.01 4526.65,5527.01 4529.43,5529.79 4529.43,5530.44 4532.22,5533.23 4542.4,5533.23 4545.18,5530.44 4545.18,5529.79 4547.96,5527.01 4558.14,5527.01 4560.93,5529.79 4560.93,5530.44 4563.71,5533.23 4573.89,5533.23 4576.68,5530.44 4576.68,5529.79 4579.46,5527.01 4589.64,5527.01 4592.42,5529.79 4592.42,5530.44 4595.21,5533.23 4605.39,5533.23 4608.17,5530.44 4608.17,5529.79 4610.96,5527.01 4621.14,5527.01 4623.92,5529.79 4623.92,5530.44 4626.7,5533.23 4636.88,5533.23 4639.67,5530.44 4639.67,5529.79 4642.45,5527.01 4652.63,5527.01 4655.42,5529.79 4655.42,5530.44 4658.2,5533.23 4668.38,5533.23 4671.16,5530.44 4671.16,5529.79 4673.95,5527.01 4684.13,5527.01 4686.91,5529.79 4686.91,5530.44 4689.7,5533.23 4701.51,5533.23 4731.44,5563.16 4735.85,5563.16 4737.01,5562.01 4737.01,5552.01 4704.61,5519.61 4704.61,5514.41 4707.01,5512.01 4718.85,5512.01 4743.85,5537.01 4756.04,5537.01 4758.82,5534.22 4758.82,5530.29 4727.01,5498.47 4727.01,5492.01 4732.01,5487.01 4735.57,5487.01 4773.36,5524.79 4791.27,5524.79 4794.06,5522.01 4794.06,5518.3 4752.01,5476.25 4752.01,5467.01 4757.01,5462.01 4767.01,5462.01 4794.79,5489.79 4799.22,5489.79 4802.01,5487.01 4802.01,5481.01 4772.01,5451.01 4772.01,5447.01 4777.01,5442.01 4782.01,5442.01 4812.01,5472.01 4827.67,5472.01 4832.42,5467.26 4832.42,5463.32 4794.06,5424.96 U5.2@4794.06,5364.88
SD_DQ1: U1.M16 U5.4 | length 983
  Top Layer w3.94: U1.M16@4493.23,5516.77 4501.73,5508.27 4511.99,5508.27 4513.49,5506.77 4627.25,5506.77 4639.11,5494.91 4632.36,5488.16 4597.01,5488.16 4594.22,5485.37 4594.22,5481.44 4597.01,5478.65 4630.36,5478.65 4632.01,5477.01 4632.01,5471.55 4624.22,5463.77 4624.22,5459.83 4627.01,5457.05 4676.97,5457.05 4681.19,5452.83 4681.19,5446.19 4676.19,5441.19 4642.01,5441.19 4639.45,5438.63 4639.45,5435.02 4642.01,5432.46 4676.97,5432.46 4676.97,5423.25 4676.29,5422.57 4637.01,5422.57 4634.22,5419.79 4634.22,5415.85 4637.01,5413.07 4676.97,5413.07 4702.01,5438.11 4702.01,5457.01 4704.79,5459.79 4719.22,5459.79 4722.01,5457.01 4722.01,5427.01 4717.01,5422.01 4717.01,5413.98 4721.74,5409.25 4721.74,5398.23 4717.01,5393.5 4717.01,5382.48 4721.74,5377.75 4721.74,5366.73 4717.01,5362.01 4717.01,5317.01 4762.01,5272.01 4827.01,5272.01 4857.05,5302.05 U5.4@4857.05,5364.88
SD_DQ2: U1.K16 U5.5 | length 1006.3
  Top Layer w3.94: U1.K16@4493.23,5579.77 4774.25,5579.77 4862.01,5492.01 4997.01,5492.01 5002.01,5487.01 5002.01,5482.01 4996.36,5476.36 4900.65,5476.36 4896.3,5472.01 4896.3,5456.08 4898.65,5453.73 5019.22,5453.73 5022.01,5450.94 5022.01,5442.01 5017.05,5437.05 4917.05,5437.05 4887.87,5407.87 4887.87,5375.55 4888.55,5374.88 U5.5@4888.55,5364.88
SD_DQ3: U1.M15 U5.7 | length 978.3
  Top Layer w3.94: U1.M15@4461.73,5516.77 4464.87,5516.77 4465.45,5516.18 4467.31,5516.18 4483.18,5500.32 4508.7,5500.32 4581.4,5427.61 4581.4,5397.01 4584.19,5394.22 4588.12,5394.22 4590.91,5397.01 4590.91,5423.65 4597.01,5429.75 4607.01,5429.75 4610.94,5425.81 4610.94,5398.07 4652.01,5357.01 4657.01,5357.01 4659.28,5359.28 4659.28,5402.01 4662.07,5404.79 4666.01,5404.79 4668.79,5402.01 4668.79,5340.23 4672.01,5337.01 4677.01,5337.01 4681.88,5341.88 4681.88,5402.01 4684.2,5404.33 4687.48,5404.33 4696.23,5395.57 4696.23,5312.78 4752.01,5257.01 4872.21,5257.01 4945.86,5330.66 4945.86,5354.2 4946.54,5354.88 4946.54,5359.88 U5.7@4951.54,5364.88
SD_DQ4: U1.M14 U5.8 | length 1016.4
  Top Layer w3.94: U1.M14@4430.24,5516.77 4430.24,5506.55 4445.28,5491.51 4445.28,5480.46 4456.92,5468.82 4499.46,5468.82 4560.96,5407.32 4560.96,5362.01 4622.28,5300.68 4623.54,5301.94 4623.54,5352.01 4626.33,5354.79 4630.26,5354.79 4633.05,5352.01 4633.05,5289.92 4640.96,5282.01 4647.01,5282.01 4651.69,5286.69 4651.69,5311.2 4660.29,5319.79 4664.22,5319.79 4667.01,5317.01 4667.01,5275.94 4670.94,5272.01 4677.01,5272.01 4680.64,5275.64 4680.64,5295.14 4685.29,5299.79 4689.22,5299.79 4692.01,5297.01 4692.01,5262.89 4697.01,5257.89 4710.39,5257.89 4726.27,5242.01 4894.42,5242.01 4989.21,5336.79 4989.21,5358.69 U5.8@4983.03,5364.88